# EAGLE board team2 (EAGLE 8.6.0)
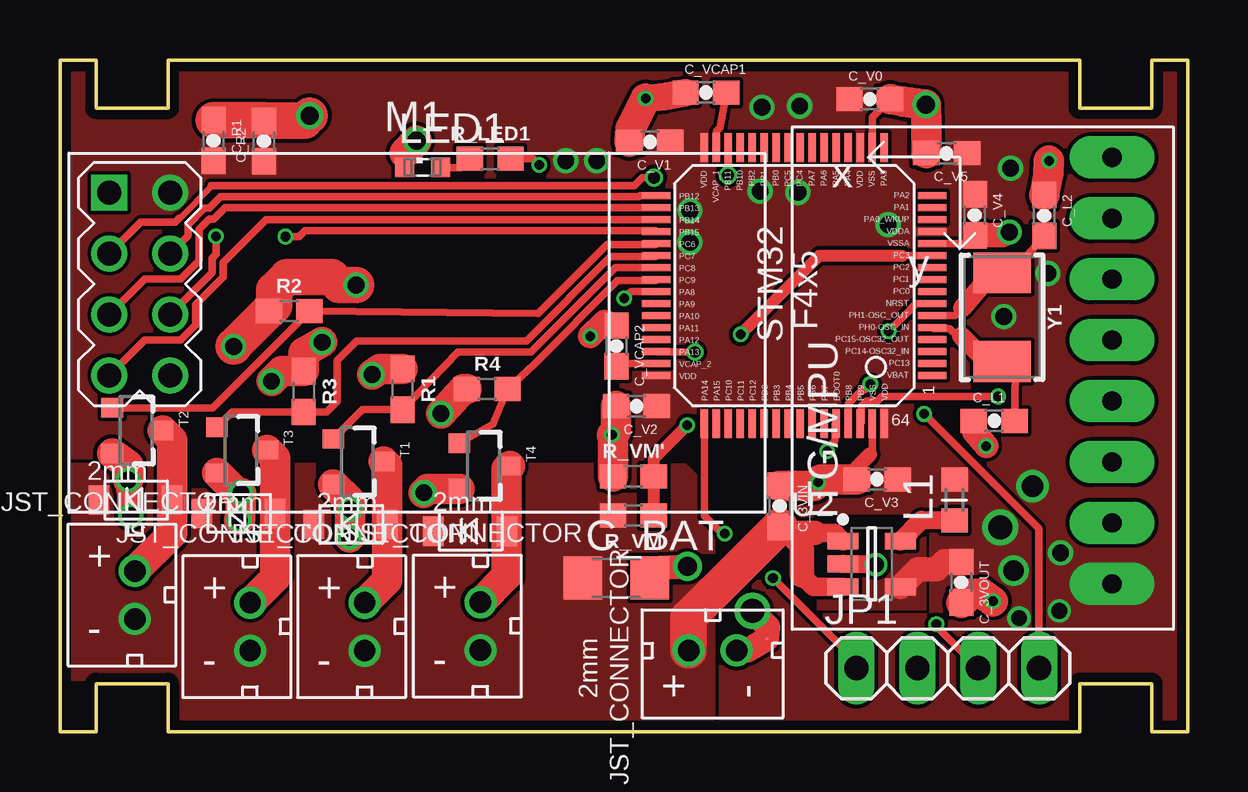
[diagram p0: board, top side]
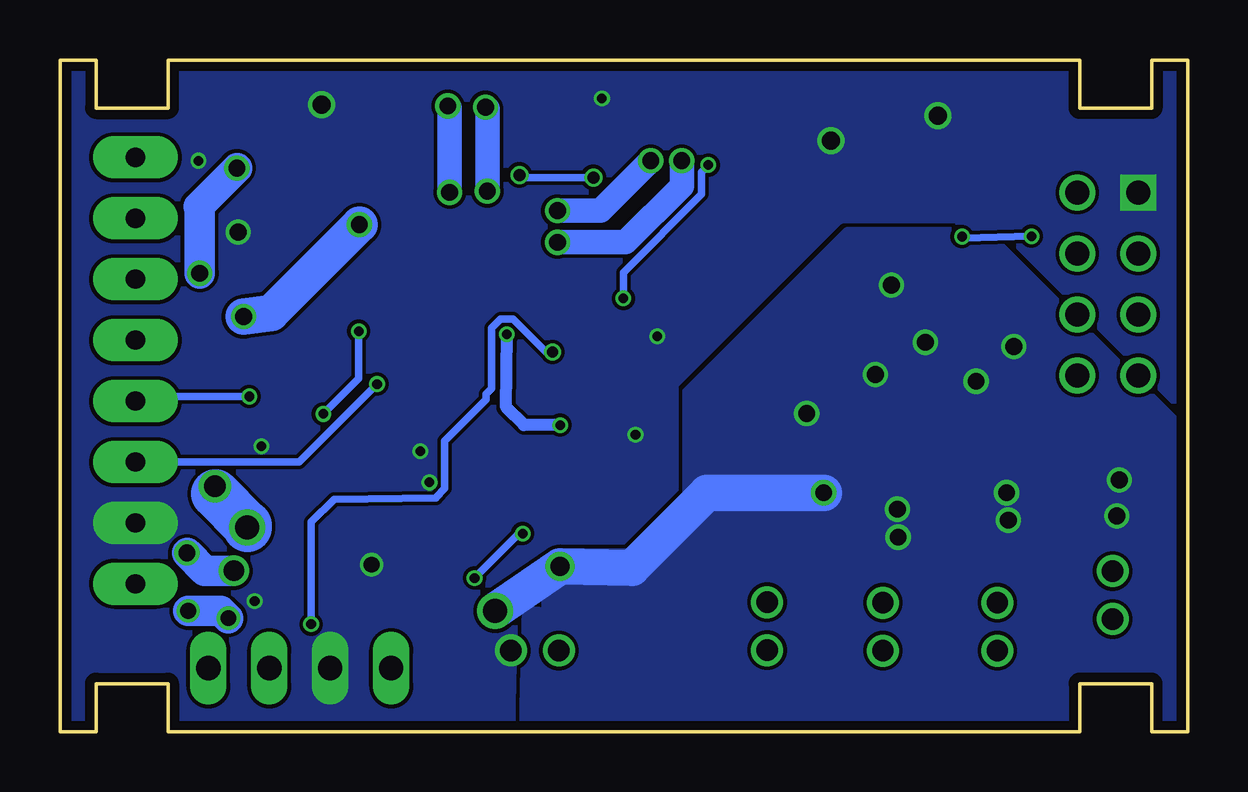
[diagram p1: board, bottom side, seen from below]

Size 47 x 28 mm. Coordinates in mm from the lower left corner, seen from the top.
Outline: 0,0 0,28 1.5,28 1.5,26 4.5,26 4.5,28 42.5,28 42.5,26 45.5,26 45.5,28 47,28 47,0 45.5,0 45.5,2 42.5,2 42.5,0 4.5,0 4.5,2 1.5,2 1.5,0 0,0
Copper layers (1*16): Top 0.035559375mm / dielectric 1.6mm / Bottom 0.035559375mm
Design rules "oshpark-2layer": minimum track width 6mil, minimum drill 10mil, track to track 6mil, track to pad 6mil, pad to pad 6mil, via to via 6mil, smd to smd 6mil, copper to edge 15mil, drill to drill 6mil, minimum pad ring 5mil, minimum via ring 5mil, stop-mask expansion 2.5mil, vias tented up to drill 0mil, thermal gap 10mil

## Footprints (pad centres in the part's own frame; a part is rotated, then mirrored left to right if it is on the bottom)
0603-CAP = smd 1.1 x 1: 1 -0.85,0; 2 0.85,0
C1206 = smd 1.6 x 1.8: 1 -1.4,0; 2 1.4,0
MINI2-F3-B = smd 1.22 x 0.85: NEG 0,1.55; POS 0,-1.5
1X04 = drill 1.016 long: 1 -3.81,0; 2 -1.27,0; 3 1.27,0; 4 3.81,0
JST_CONNECTOR_FEMALE = drill 0.889: + 0,1; - 0,-1
L0603 = smd 1 x 1.1: 1 -0.85,0; 2 0.85,0
SML0603 = smd 0.8 x 0.8: A 0.75,0; C -0.75,0
WIRELESS-NRF24L01 = drill 1 square: 1 -12.7,6.35 | drill 1: 2 -10.16,6.35; 3 -12.7,3.81; 4 -10.16,3.81; 5 -12.7,1.27; 6 -10.16,1.27; 7 -12.7,-1.27; 8 -10.16,-1.27
0603 = smd 1.1 x 1: 1 -0.85,0; 2 0.85,0
SOT23-3 = smd 0.8 x 0.9: 1 -0.95,-1; 2 0.95,-1; 3 0,1.1
GY-521 = drill 0.8 pad 1.778 long: ADO -8.89,-6.35; GND -8.89,6.35; INT -8.89,-8.89; SCL -8.89,3.81; SDA -8.89,1.27; VCC -8.89,8.89; XCL -8.89,-3.81; XDA -8.89,-1.27
MICROCHIP_MCP1603T-330I-OS_2 = smd 1.3 x 0.7: 1 -1.2,0.95; 2 -1.2,0; 3 -1.2,-0.95; 4 1.2,-0.95; 5 1.2,0.95
SPLITTER = smd 0.102 x 0.102: 1 0,0; 2 0,0
STM32F405/415_LQFP64 = smd 1.2 x 0.3: BOOT0 -5.75,-1.75; PA3 5.75,-3.75; PA4 5.75,-2.25; PA5 5.75,-1.75; PA6 5.75,-1.25; PA7 5.75,-0.75; PA14 -5.75,3.75; PA15 -5.75,3.25; PB0 5.75,0.75; PB1 5.75,1.25; PB2 5.75,1.75; PB3 -5.75,0.75; PB4 -5.75,0.25; PB5 -5.75,-0.25; PB6 -5.75,-0.75; PB7 -5.75,-1.25; PB8 -5.75,-2.25; PB9 -5.75,-2.75; PB10 5.75,2.25; PB11 5.75,2.75; PC4 5.75,-0.25; PC5 5.75,0.25; PC10 -5.75,2.75; PC11 -5.75,2.25; PC12 -5.75,1.75; PD2 -5.75,1.25; VCAP_1 5.75,3.25; VDD_0 5.75,-2.75; VDD_1 5.75,3.75; VDD_3 -5.75,-3.75; VSS_0 5.75,-3.25; VSS_1 -5.75,-3.25 | smd 0.3 x 1.2: NRST -0.75,-5.75; PA0_WKUP 2.75,-5.75; PA1 3.25,-5.75; PA2 3.75,-5.75; PA8 -0.25,5.75; PA9 -0.75,5.75; PA10 -1.25,5.75; PA11 -1.75,5.75; PA12 -2.25,5.75; PA13 -2.75,5.75; PB12 3.75,5.75; PB13 3.25,5.75; PB14 2.75,5.75; PB15 2.25,5.75; PC0 -0.25,-5.75; PC1 0.25,-5.75; PC2 0.75,-5.75; PC3 1.25,-5.75; PC6 1.75,5.75; PC7 1.25,5.75; PC8 0.75,5.75; PC9 0.25,5.75; PC13 -3.25,-5.75; PC14 -2.75,-5.75; PC15 -2.25,-5.75; PH0 -1.75,-5.75; PH1 -1.25,-5.75; VBAT -3.75,-5.75; VCAP_2 -3.25,5.75; VDD_2 -3.75,5.75; VDDA 2.25,-5.75; VSSA 1.75,-5.75
CRYSTAL-SMD-5X3.2-2PAD = smd 1.7 x 2.4: P$1 1.85,0; P$2 -1.85,0

## Placement (x,y rotation side)
C_3VIN  4.7 uF  [0603-CAP]  30,9.4 270 top
C_3VOUT  4.7 uF  [0603-CAP]  37.57,6.22 270 top
C_BAT  100 uF  [C1206]  23.19,6.4 0 top
C_L1  36pF  [0603-CAP]  38.94,12.95 0 top
C_L2  36pF  [0603-CAP]  41.02,21.51 270 top
C_R1  100 nF  [0603-CAP]  6.4,24.64 270 top
C_R2  10 uF  [0603-CAP]  8.51,24.61 90 top
C_V0  0.1uF  [0603-CAP]  33.76,26.37 0 top
C_V1  0.1uF  [0603-CAP]  24.59,24.59 180 top
C_V2  0.1uF  [0603-CAP]  24.03,13.56 180 top
C_V3  0.1uF  [0603-CAP]  34.06,10.52 180 top
C_V4  0.1uF  [0603-CAP]  38.13,21.54 270 top
C_V5  4.7uF  [0603-CAP]  36.96,24.1 180 top
C_VCAP1  2.2uF  [0603-CAP]  26.92,26.64 0 top
C_VCAP2  2.2uF  [0603-CAP]  23.19,16.08 270 top
D1  DB2W40300L  [MINI2-F3-B]  12.14,8.64 90 top
D2  DB2W40300L  [MINI2-F3-B]  3.17,9.65 90 top
D3  DB2W40300L  [MINI2-F3-B]  7.47,9.09 90 top
D4  DB2W40300L  [MINI2-F3-B]  17.12,8.36 90 top
JP1  [1X04]  37.01,2.64 0 top
JST  A  [JST_CONNECTOR_FEMALE]  27.2,3.38 90 top
L1  4.7 uH  [L0603]  37.29,9.65 90 top
LED1  [SML0603]  15.11,23.52 0 top
M1  WIRELESS-NRF24L01  [WIRELESS-NRF24L01]  14.75,16.12 0 top
M4_JST  JST_CONNECTOR_FEMALE  [JST_CONNECTOR_FEMALE]  17.53,4.39 0 top
R1  10K  [0603]  14.27,14.27 270 top
R2  10K  [0603]  9.55,17.53 0 top
R3  10K  [0603]  10.16,14.17 270 top
R4  10K  [0603]  17.81,14.27 0 top
R_LED1  1K  [0603]  17.93,23.88 0 top
R_VM  10K  [0603]  23.9,9.02 180 top
R_VM'  10K  [0603]  23.9,10.64 0 top
T1  N-CHANNEL-MOSFET-IRLML6244TRPBF  [SOT23-3]  12.4,11.25 270 top
T2  N-CHANNEL-MOSFET-IRLML6244TRPBF  [SOT23-3]  3.17,12.55 270 top
T3  N-CHANNEL-MOSFET-IRLML6244TRPBF  [SOT23-3]  7.54,11.73 270 top
T4  N-CHANNEL-MOSFET-IRLML6244TRPBF  [SOT23-3]  17.65,11.07 270 top
U1  GY-521MPU6050  [GY-521]  34.97,15.05 180 top
U2  MICROCHIP_MCP1603T-330I-OSMICROCHIP_MCP1603T-330I-OS_0_2  [MICROCHIP_MCP1603T-330I-OS_2]  33.83,6.99 0 top
U$1  SPLITTER  [SPLITTER]  29.47,3.87 180 top
U$2  JST_CONNECTOR_FEMALE  [JST_CONNECTOR_FEMALE]  12.7,4.37 0 top
U$3  JST_CONNECTOR_FEMALE  [JST_CONNECTOR_FEMALE]  3.12,5.69 0 top
U$4  STM32F405/415_LQFP64  [STM32F405/415_LQFP64]  30.61,18.59 90 top
U$5  JST_CONNECTOR_FEMALE  [JST_CONNECTOR_FEMALE]  7.92,4.37 0 top
Y1  [CRYSTAL-SMD-5X3.2-2PAD]  39.27,17.27 270 top

## Library data of the parts
C_3VIN C_3VOUT C_L1 C_L2 C_R1 C_R2 C_V0 C_V1-C_V5 C_VCAP1 C_VCAP2 = SparkFun
C_BAT = adafruit
D1-D4 M1 = AP_quad
JP1 = pinhead
JST M4_JST U$2 U$3 U$5 = JST_CONNECTOR_FEMALE. through hole
L1 = BeagleBone_Blue_R3
LED1 = led
R1-R4 R_LED1 R_VM R_VM' = SparkFun-Resistors
T1-T4 = AP_quad; DATASHEET: http://www.mouser.com/ds/2/196/irlml6244pbf-936666.pdf; MOUSER: 942-IRLML6244TRPBF; URL: http://www.mouser.com/Search/ProductDetail.aspx?R=IRLML6244TRPBFvirtualkey57370000virtualkey942-IRLML6244TRPBF
U1 = AP_quad; SPICEPREFIX: X
U2 = OS; CIIVA_IDS: 1482394; DATASHEET_VERSION: revA, May-2007; FOOTPRINT_VARIANT_NAME_0: Level C; FOOTPRINT_VARIANT_NAME_1: Level B; FOOTPRINT_VARIANT_NAME_2: Level A; IMPORTED: yes; IMPORTED_FROM: vault; IMPORT_TS: 1521863048; MF: Microchip; MPN: MCP1603T-330I/OS; PACKAGE: TSOT-OS5; PACKAGE_DESCRIPTION: 5-Lead Plastic Small Outline Transistor (OS) [TSOT]; PACKAGE_VERSION: revBB, Aug-2009; PREFIX: U; RELEASE_DATE: 1300403343; VAULT_GUID: 142AD9D9-9D67-4D5E-AE6C-DB6745BD0393; VAULT_REVISION: 6607C391-A292-469D-8A3D-49340035FC28
U$1 = splitter
U$4 = STM32F10x F4xx
Y1 = SparkFun-Clocks

## Nets
3.3V: C_3VOUT.1 C_R1.2 C_R2.1 C_V0.1 C_V1.1 C_V2.1 C_V3.1 C_V4.1 C_V5.1 L1.2 M1.2 U1.VCC U2.4 U$4.VDD_0 U$4.VDD_1 U$4.VDD_2 U$4.VDD_3 U$4.VDDA
BATTERY: C_3VIN.2 C_BAT.1 D1.NEG D2.NEG D3.NEG D4.NEG JST.+ M4_JST.- R_VM.2 U2.1 U2.3 U$2.- U$3.- U$5.-
CE: M1.3 U$4.PB11
CS: M1.4 U$4.PB12
GND: C_3VIN.1 C_3VOUT.2 C_L1.1 C_L2.1 C_R1.1 C_R2.2 C_V0.2 C_V1.2 C_V2.2 C_V3.2 C_V4.2 C_V5.2 C_VCAP1.1 C_VCAP2.1 JP1.2 JST.- LED1.C M1.1 R_VM'.1 U1.GND U2.2 U$1.2 U$4.BOOT0 U$4.VSS_0 U$4.VSS_1 U$4.VSSA
L1: LED1.A R_LED1.1
LED1: R_LED1.2 U$4.PA8
LED3: U$4.PC4
MGND: C_BAT.2 R1.1 R2.1 R3.1 R4.1 T1.2 T2.2 T3.2 T4.2 U$1.1
MISO: M1.7 U$4.PB14
MOSI: M1.6 U$4.PB15
MOTOR1: R1.2 T1.1 U$4.PC8
MOTOR2: R2.2 T2.1 U$4.PC6
MOTOR3: R3.2 T3.1 U$4.PC7
MOTOR4: R4.2 T4.1 U$4.PC9
N$1: D2.POS T2.3 U$3.+
N$2: D3.POS T3.3 U$5.+
N$3: D1.POS T1.3 U$2.+
N$4: D4.POS M4_JST.+ T4.3
N$8: L1.1 U2.5
NRST: JP1.4 U$4.NRST
OSC_IN: C_L1.2 U$4.PH0 Y1.P$1
OSC_OUT: C_L2.2 U$4.PH1 Y1.P$2
SCK: M1.5 U$4.PB13
SCL: U1.SCL U$4.PB8
SDA: U1.SDA U$4.PB9
SWCLK: JP1.1 U$4.PA14
SWDIO: JP1.3 U$4.PA13
V_C1: C_VCAP1.2 U$4.VCAP_1
V_C2: C_VCAP2.2 U$4.VCAP_2
VOLTMETER: R_VM'.2 R_VM.1 U$4.PC3

## Tracks (layer width: path | path; a pad name or v marks a point on that pad's centre or on a via)
3.3V  (via drill 0.65, 0.7, 0.85, 0.9, 1)
  Top 1.016: U2.4 35.75,6.76 36.52,6.76 36.85,7.09 37.55,7.09 C_3VOUT.1
  Bottom 1.016: v29.18,22.53 29.18,25.96 v29.26,26.04 | v30.76,22.48 30.76,26.01 v30.84,26.09 | v22.38,23.8 24.46,21.72 v26.26,21.72 | v21.08,23.8 21.08,22.73 23.42,20.4 v26.26,20.4
  Bottom 1.27: v39.62,23.5 41.22,21.89 41.17,21.84 v41.17,19.1 | v39.75,6.71 40.97,6.71 v41.71,7.44 | v39.98,4.72 40.31,5.03 v41.66,5.03
  Bottom 1.524: v34.52,21.13 38.2,17.45 v39.34,17.3
  Bottom 2.032: v39.19,8.51 39.19,8.6 40.51,9.92
  other vias: 40.54,10.24
  pour Top (rank 2, no thermals): -0.84,28.6 46.99,27.94 46.99,0 0,0
BATTERY
  Top 0.762: 31.47,8.28 32.29,8.28 U2.1 | C_3VIN.2 30.94,7.61 | 30.94,6.5 31.41,6.04 U2.3
  Top 1.016: C_3VIN.2 30.27,8.28 31.47,8.28 | 30.94,7.61 30.94,6.5
  Top 1.524: JST.+ 26.2,4.75 C_3VIN.2
  pour Top (no thermals): 25.91,10.82 26.92,9.8 26.92,0.03 26.7,-0.2 0.2,-0.2 0.05,-0.05 0,10.85
CE  (via drill 0.5)
  Top 0.254: 4.97,21.41 4.99,21.43 5.02,21.43 6.3,22.71 6.3,22.75
  Top 0.305: 6.3,22.75 23.94,22.75 24.29,23.1 v24.77,23.1 | M1.3 3.36,21.23 4.79,21.23 4.97,21.41 | U$4.PB11 | U$4.PB11 27.86,23.66 | v27.85,23.2 U$4.PB11
  Bottom 0.305: v24.77,23.1 27.72,23.1 v27.85,23.2
CS
  Top 0.305: U$4.PB12 24.18,22.34 24.13,22.3 6.69,22.3 6.21,21.82 6.02,21.82 5.34,21.13 5.34,20.67 M1.4
GND  (via drill 0.4, 0.65, 0.7, 0.75)
  Top 0.305: U$4.VSS_1 33.86,11.66 33.76,11.56 | U$4.BOOT0 32.31,12.8 32.31,12.12 31.98,11.78 v31.98,11.69 | U$4.VSSA 37.78,20.34 C_V4.2 | U$4.VSS_0 33.86,25.62 C_V0.2
  Top 0.61: 33.76,11.56 33.21,11.01 C_V3.2
  Top 0.762: U2.2 v34.01,6.96 | LED1.C 14.36,24.12
  Top 1.016: C_VCAP2.1 22.69,17.08 v22.1,16.48 | C_L1.1 38.11,12.49 v38.61,11.9 | C_V4.2 39.28,20.69 v39.57,20.83 | U$1.2 28.65,3.38 JST.-
  Top 1.143: C_VCAP1.1 25.18,26.47 v24.41,26.39
  Top 1.27: C_V1.2 23.79,25.13 v24.41,26.39 | C_V0.2 35.15,26.26 v36.09,26.14 36.11,25.29 C_V5.2 | C_L2.1 41.2,23.27 v41.22,23.8 | C_3VIN.1 31.46,10.25 v31.6,10.39 31.73,10.52 C_V3.2 | C_3VOUT.2 37.93,5.74 38.39,5.74 38.42,5.77 v38.89,5.44 | C_V2.2 23.18,12.54 v23.01,12.37 23.05,12.33 R_VM'.1 | 8.48,25.49 C_R2.2 | 14.36,24.12 v14.86,24.64
  Top 1.524: C_R1.1 8.48,25.49 | C_R2.2 10.2,25.46 v10.41,25.68
  pour Bottom (rank 2, no thermals): -0.05,27.94 -0.05,0.05 0,0 46.99,0 46.99,27.94 0,27.94
L1
  Top 0.305: LED1.A 16.73,23.52 R_LED1.1
LED1  (via drill 0.4)
  Top 0.305: v23.52,18.06 23.8,18.34 U$4.PA8 | v19.97,23.62 19.72,23.88 R_LED1.2
  Bottom 0.305: v19.96,23.61 v19.97,23.62 20.27,23.33 20.27,22.4 23.52,19.14 v23.52,18.06
MGND  (via drill 0.7, 0.8, 1)
  Top 1.016: v2.85,10.49 2.85,10.09 2.88,10.05 2.88,9.54 v2.95,8.99 | U$1.1 29.51,4.37 v28.85,5.03 | C_BAT.2 25.02,6.83 v26.16,6.88
  Top 1.27: v10.92,16.23 10.16,15.8 R3.1 9.23,15.02 v8.81,14.61 | T2.2 2.85,11.11 v2.85,10.49 | T3.2 7.35,9.98 v7.54,9.96 7.52,8.87 v7.47,8.81 | R1.1 13.35,15.12 v13.01,14.88 | R4.1 16.82,14.28 v15.88,13.26 | T4.2 15.33,10.12 v15.16,9.96 | T1.2 12.09,9.61 v12.09,9.27 12.09,8.13 v12.06,8.1
  Top 1.524: v7.24,16.05 7.24,16.07 R2.1 8.94,17.76 8.94,18.41 9.47,18.94 11.33,18.94 11.65,18.62 v12.34,18.62
  Bottom 1.524: v15.16,9.96 20.04,9.96 23.16,6.83 v26.16,6.88 v28.85,5.03
  pour Bottom: -0.2,10.54 -0.2,12.32 8.38,20.9 14.22,20.9 20.95,14.17 20.95,8.23 21.67,7.52 26.04,7.52 26.82,6.73 26.82,5.05 27.64,5.13 27.76,0.18 0.15,0.08 -0.23,0.46 -0.23,10.46
MISO
  Top 0.305: U$4.PB14 8.59,21.34 6.81,19.56 6.81,18.96 5.65,17.8 5.65,16.95 5.03,16.33 3.53,16.33 M1.7
MOSI  (via drill 0.4)
  Top 0.305: v9.4,20.64 9.97,20.64 10.22,20.89 24.81,20.89 U$4.PB15 | M1.6 6.35,19.14 6.35,19.75 6.5,19.9 v6.5,20.65
  Bottom 0.305: v6.5,20.65 9.34,20.57 v9.4,20.64
MOTOR1
  Top 0.305: U$4.PC8 23.15,19.34 19.63,15.82 16.6,15.82 R1.2 12.62,13.43 T1.1
MOTOR2
  Top 0.305: U$4.PC6 24.81,20.3 24.13,20.3 22.81,20.3 19.93,17.42 10.44,17.53 R2.2 6.37,13.5 T2.1
MOTOR3
  Top 0.305: U$4.PC7 24.81,19.8 22.96,19.8 19.44,16.28 12.37,16.28 11.56,15.47 11.56,13.77 11.11,13.32 R3.2 7.18,13.32 T3.1
MOTOR4
  Top 0.305: T4.1 18.05,12.83 R4.2 19.77,15.32 23.25,18.8 23.61,18.8 24.81,18.8 U$4.PC9
N$1
  Top 1.27: U$3.+ 4.67,8.24 D2.POS 4.67,12.15 T2.3
N$2
  Top 1.27: T3.3 8.97,11.41 D3.POS 8.97,6.41 U$5.+
N$3
  Top 1.27: T1.3 13.64,11.11 D1.POS 13.64,6.31 U$2.+
N$4
  Top 1.27: M4_JST.+ 18.62,6.49 D4.POS 18.62,10.94 T4.3
N$8
  Top 0.762: U2.5 35.91,8.81 L1.1
NRST  (via drill 0.4)
  Top 0.305: v34.54,16.69 35.45,17.6 35.45,17.62 35.68,17.84 U$4.NRST | v36.03,13.24 38.89,10.38 | 38.89,10.38 38.89,10.36 | JP1.4 40.79,2.67 40.79,8.48 38.89,10.38
  Bottom 0.305: v36.03,13.24 34.54,14.73 v34.54,16.69
OSC_IN
  Top 0.305: Y1.P$1 39.81,14.88 C_L1.2 | U$4.PH0 36.4,16.8 37.08,16.8 37.4,16.48 37.57,16.48
  Top 0.762: 37.57,16.48 38.63,15.42 Y1.P$1
OSC_OUT
  Top 0.305: 39.27,19.75 Y1.P$2 39.66,19.12 C_L2.2 | U$4.PH1 37.31,17.34 37.62,17.65
  Top 0.762: 37.62,17.65 38.86,19.12 Y1.P$2
SCK
  Top 0.305: U$4.PB13 24.32,21.84 6.88,21.84 6.4,21.36 6.21,21.36 5.79,20.94 5.79,19.63 5.03,18.87 3.53,18.87 M1.5
SCL  (via drill 0.4)
  Top 0.305: v33.78,14.49 33.53,14.24 33.42,14.24 32.86,13.67 U$4.PB8
  Bottom 0.305: v33.78,14.49 37.03,11.24 U1.SCL
SDA  (via drill 0.4)
  Top 0.305: v39.11,13.97 34.27,13.97 34.08,13.78 33.61,13.78 33.4,13.57 33.4,12.89 U$4.PB9
  Bottom 0.305: v39.11,13.97 43.66,13.97 U1.SDA
SWCLK  (via drill 0.4)
  Top 0.305: U$4.PA14 26.86,8.98 27.58,8.26 v27.71,8.26 | v29.72,6.4 33.2,2.92 JP1.1
  Bottom 0.305: v27.71,8.26 27.86,8.26 v29.72,6.4
SWDIO  (via drill 0.4, 0.45)
  Top 0.305: JP1.3 36.53,4.39 v36.53,4.47 | v26.47,15.82 24.88,15.82 U$4.PA13
  Bottom 0.305: v36.53,4.47 36.53,8.73 35.58,9.68 31.33,9.73 31.33,9.76 30.97,10.13 30.97,12.11 29.23,13.84 29.23,14.07 29,14.3 29,16.82 28.63,17.19 28.11,17.19 26.74,15.82 v26.47,15.82
V_C1
  Top 0.305: C_VCAP1.2 27.52,25.19 27.36,25.02 U$4.VCAP_1
V_C2
  Top 0.305: C_VCAP2.2 23.3,15.34 U$4.VCAP_2
VOLTMETER  (via drill 0.4)
  Top 0.305: 35.1,19.84 U$4.PC3
  Top 0.508: R_VM.1 R_VM'.2 24.75,11.38 v26.15,12.78 | v28.37,16.56 31.65,19.84 35.1,19.84
  Bottom 0.508: v26.15,12.78 27.66,12.78 28.4,13.51 v28.37,16.56